# Altium PCB CLAMP_PCB.PcbDoc
Units mm, origin at the board's own origin, x right, y up, seen from the top; angles counter-clockwise.
Board outline 82 x 60 mm, 2 copper layers (Top Layer, Bottom Layer); 12 components, 17 nets, 53 pads, 4 vias.
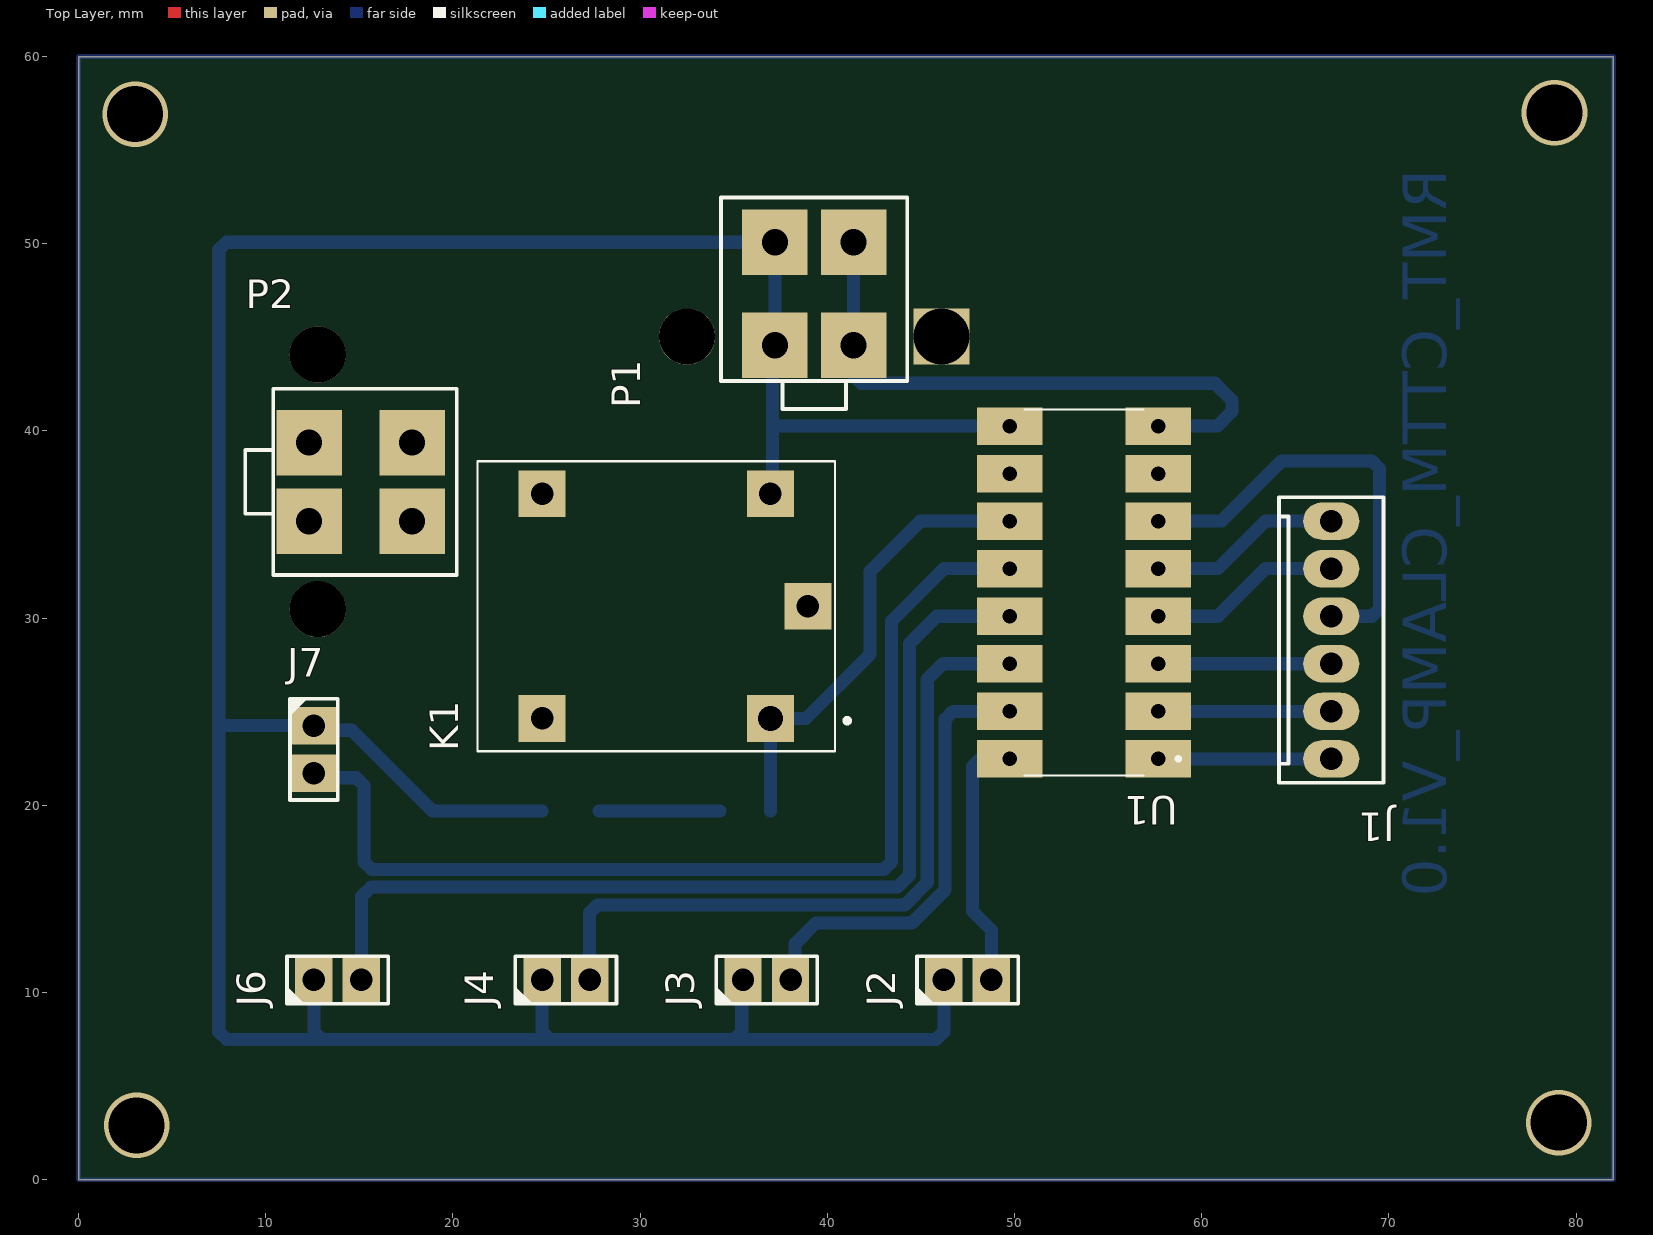
[diagram p0: Top Layer view]
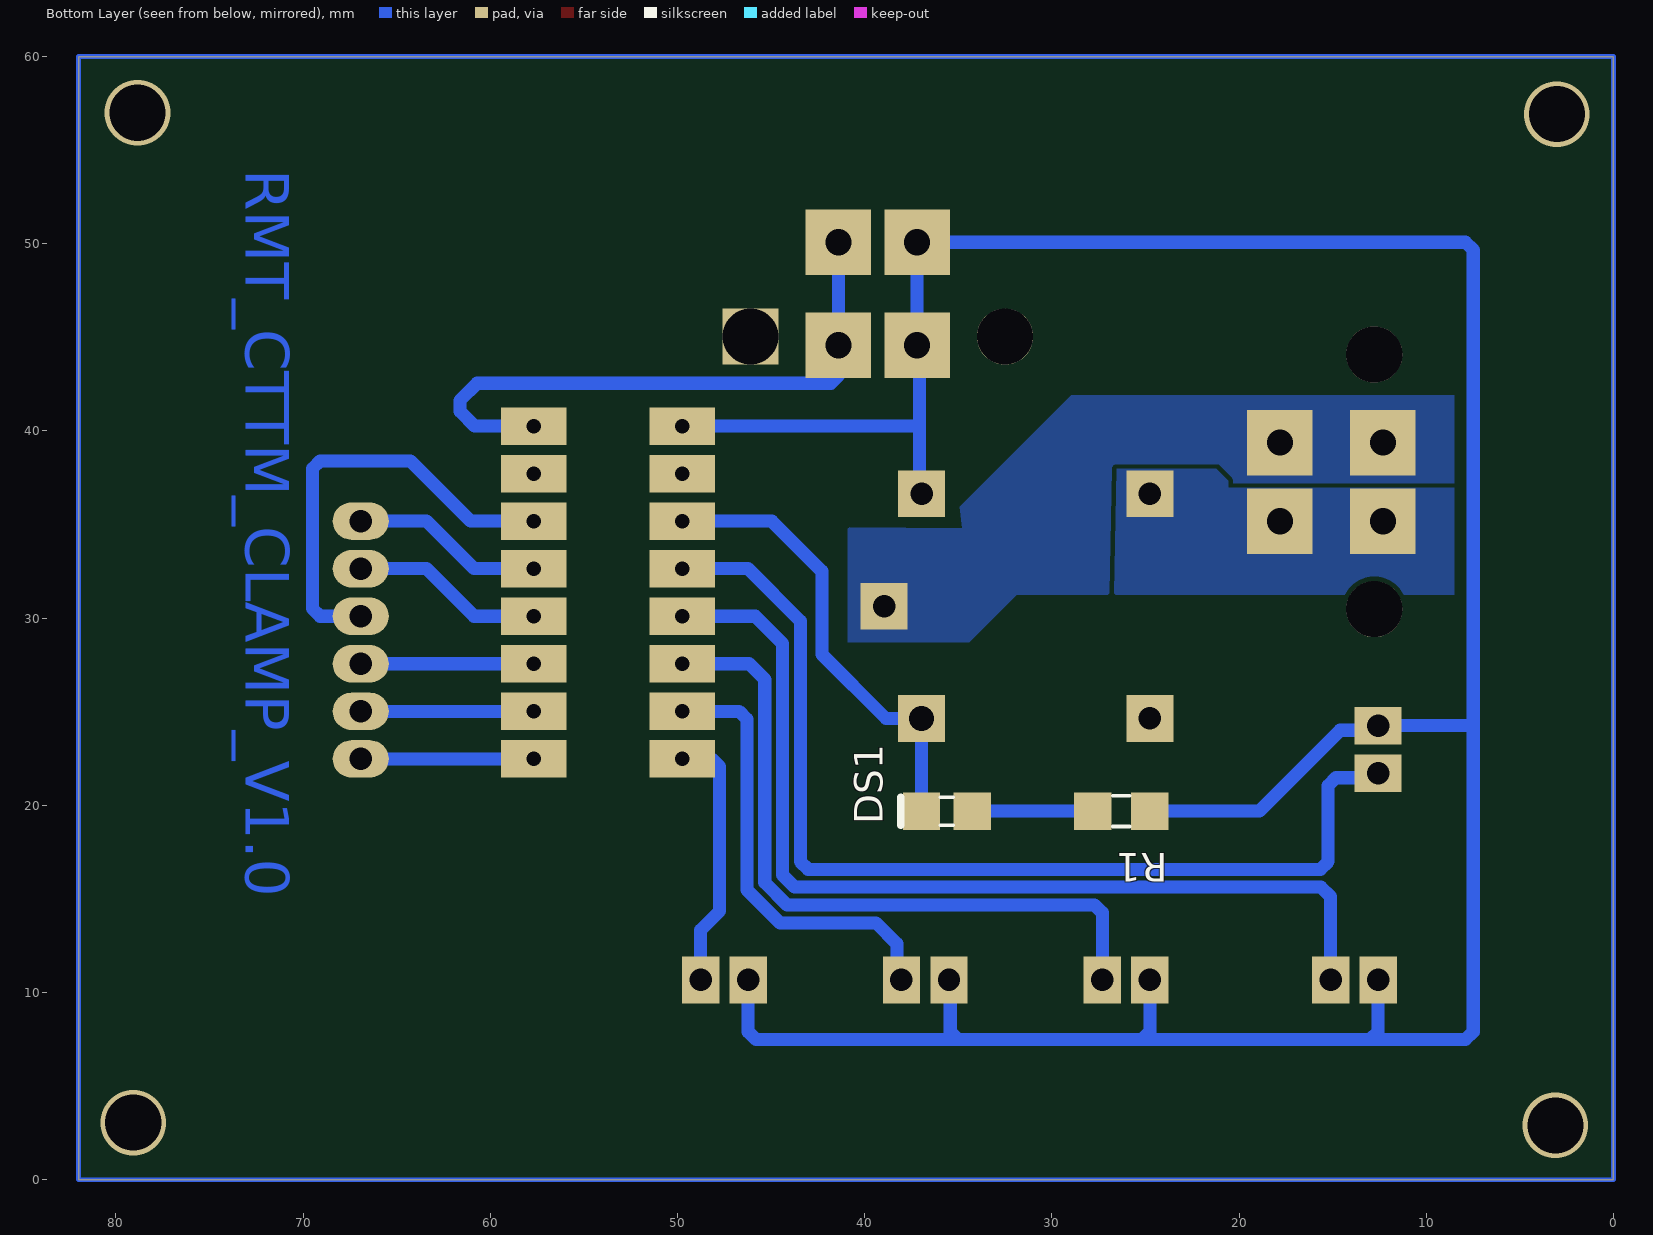
[diagram p1: Bottom Layer view, seen from below]
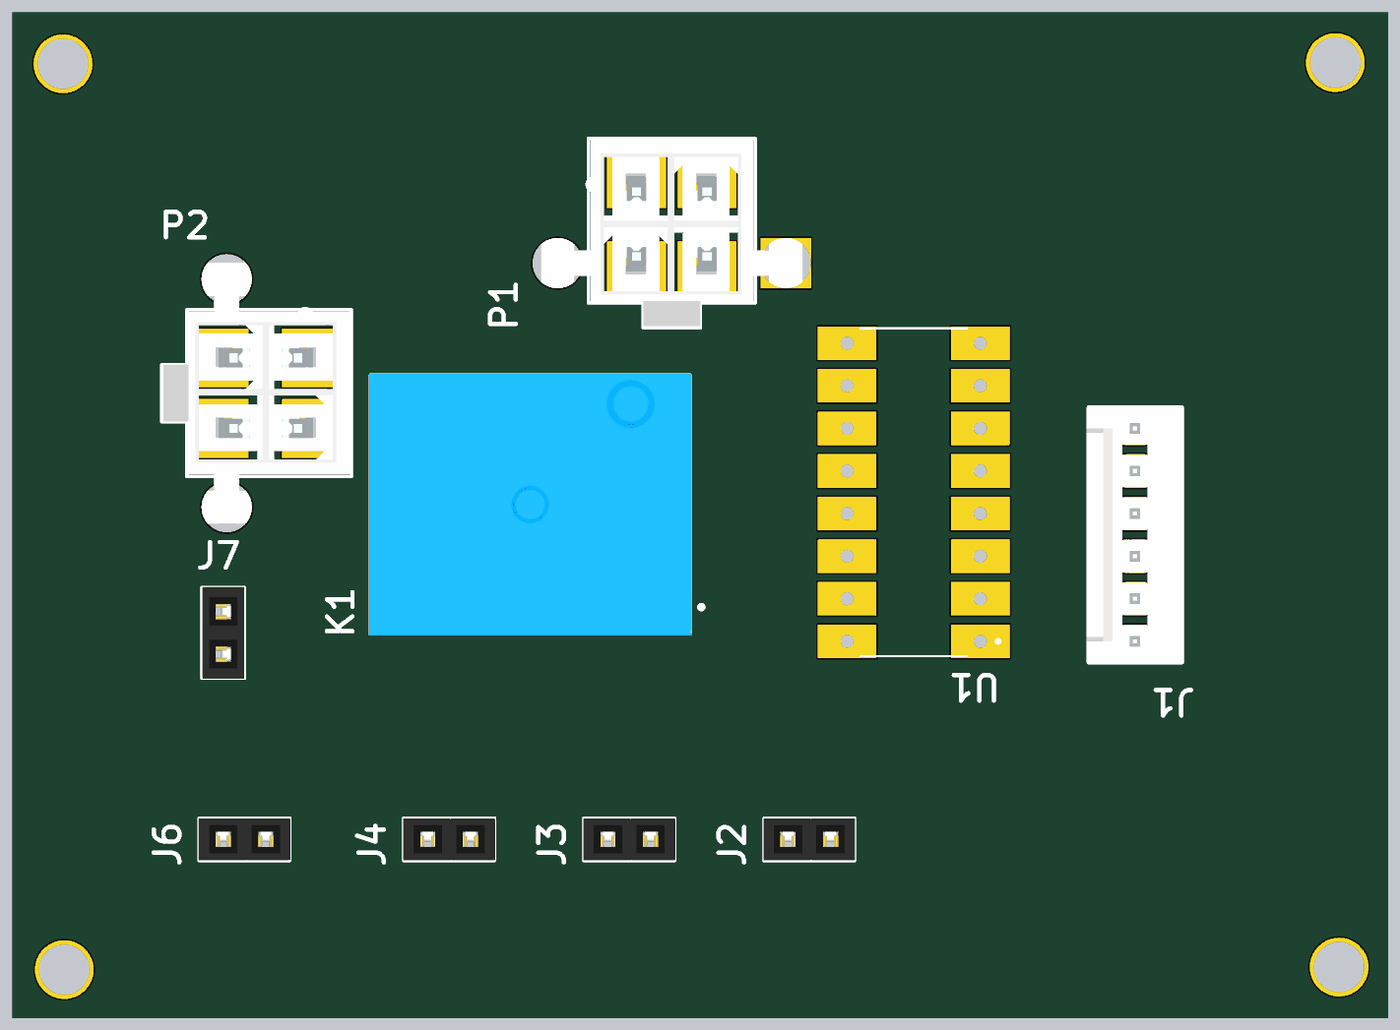
[diagram p2: 3D render of the assembled board from above, using the file's embedded part models]

## Layer stack, top to bottom
Top Solder: solder mask 0.0102, Solder Resist, Dk 3.5
Top Layer: signal copper 0.0356
Dielectric 1: dielectric 0.32, FR-4, Dk 4.8
Bottom Layer: signal copper 0.0356
Bottom Solder: solder mask 0.0102, Solder Resist, Dk 3.5

## Board outline
0,0 0,60 82,60 82,0

## Design rules (kind name [scope] priority, off if disabled: settings)
Clearance [All] p1: gap=0.254 ignorepadtopadclearanceinfootprint=FALSE except(0: Arc-Hole Track-Hole SMDPad-Hole THPad-Hole Via-Hole Fill-Hole Poly-Hole Region-Hole Text-Hole)
PolygonConnect PolygonConnect_2 [All vs IsNamedPolygon('OUT_L02_P001')] p1: connectstyle=Direct reliefconductorwidth=0.254 reliefentries=4 polygonreliefangle="90 Angle" airgapwidth=0.254
PolygonConnect PolygonConnect_1 [All vs IsNamedPolygon('NETK1_NO_L02_P000')] p2: connectstyle=Direct reliefconductorwidth=0.254 reliefentries=4 polygonreliefangle="90 Angle" airgapwidth=0.254
PolygonConnect [All] p3: connectstyle=Relief reliefconductorwidth=0.254 reliefentries=4 polygonreliefangle="90 Angle" airgapwidth=0.254
RoutingVias [All] p1: holewidth=0.711 width=1.27 viastyle="Through Hole" minholewidth=0.711 minwidth=1.27 maxholewidth=0.711 maxwidth=1.27
SolderMaskExpansion [All] p1: expansion=0.102 istentingtop=FALSE
Width [All] p1: maxlimit=0.7 minlimit=0.7 preferedwidth=0.7
30 further rules are at their usual default settings.

## Components (designator, comment, footprint, x,y, rotation, side; value= is the part's Value field where it differs from the comment)
DS1 "SML-LX1206YC-TR" LUMX-SML-LX1206YC-TR_V 35.615,19.685 r0 bottom
J1 "SWITCHING" "MOLEX KK 0022272061" 66.925,28.829 r270 top
J2 "M20-7820242" "HARWIN M20-7820245" 47.498,10.668 r90 top
J3 "M20-7820242" "HARWIN M20-7820245" 36.767,10.668 r90 top
J4 "M20-7820242" "HARWIN M20-7820245" 26.035,10.668 r90 top
J6 "M20-7820242" "HARWIN M20-7820245" 13.843,10.668 r90 top
J7 "M20-7820242" "HARWIN M20-7820245" 12.573,22.987 r0 top
K1 "SRD-05VDC-SL-C" RELAY_SRD-05VDC-SL-C 30.865,30.638 r180 top
P1 "649004221732" 649004221732#1 39.302,47.567 r180 top
P2 "649004221732" 649004221732#2 15.309,37.279 r90 top
R1 "CRCW12061K00FKEA" RESC3216X60X45ML15T20 26.29,19.685 r0 bottom
U1 "ULN2004AIN" DIP794W45P254L1969H508Q16 53.721,31.369 r180 top

## Footprints (in the part's own frame and the unit in brackets; to place one, negate y for a bottom-side part, rotate by r counter-clockwise, add the part's x,y. Pads: shape width x height; smd on the part's side, far side on the other; paste and mask are expansions set on the pad)
649004221732#1 [mm] "4.20mm Male Dual Row Vertical Header with Mounting Pegs, 4p"
  rect 3.5x3.5 hole 1.4: 1(2.1,-2.51) 2(-2.1,-2.51) 3(2.1,2.99) 4(-2.1,2.99)
  rect 3x3 hole 3 unplated: MH1(-6.8,2.53)
  round 3 hole 3 unplated: MH2(6.8,2.53)
  silkscreen extent -4.97,-4.9 4.98,6.4, body extent -7.8,-4.8 7.8,6.3, height 12.84
649004221732#2 [mm] "4.20mm Male Dual Row Vertical Header with Mounting Pegs, 4p"
  rect 3.5x3.5 hole 1.4: 1(2.1,-2.51) 2(-2.1,-2.51) 3(2.1,2.99) 4(-2.1,2.99)
  round 3 hole 3 unplated: MH1(-6.8,2.53) MH2(6.8,2.53)
  silkscreen extent -4.97,-4.9 4.98,6.4, body extent -7.8,-4.8 7.8,6.3, height 12.84
DIP794W45P254L1969H508Q16 [mm]
  rect 3.5x2 hole 0.78: 1(-3.97,8.89) 2(-3.97,6.35) 3(-3.97,3.81) 4(-3.97,1.27) 5(-3.97,-1.27) 6(-3.97,-3.81) 7(-3.97,-6.35) 8(-3.97,-8.89) 9(3.97,-8.89) 10(3.97,-6.35) 11(3.97,-3.81) 12(3.97,-1.27) 13(3.97,1.27) 14(3.97,3.81) 15(3.97,6.35) 16(3.97,8.89)
  silkscreen extent -5.13,-9.77 3.18,9.77
"HARWIN M20-7820245" [mm] "2.54mm DIL PC TAIL PIN HEADER ASSEMBLY"
  rect 2.5x2 hole 1.2: 1(0,1.27) 2(0,-1.27)
  silkscreen extent -1.27,-2.7 1.27,2.73, body extent -1.25,-2.74 1.25,2.74, height 8.5
LUMX-SML-LX1206YC-TR_V [mm] "SMD, 2-Leads, Body 3.2x1.5mm"
  rect 2x2 smd: 1(-1.35,0) 2(1.35,0)
  silkscreen extent -0.35,-0.75 2.45,0.75, body extent -1.6,-0.75 1.6,0.75, height 1.25
"MOLEX KK 0022272061" [mm]
  oval 2x3 hole 1.2: 1(-6.35,0) 2(-3.81,0) 3(-1.27,0) 4(1.27,0) 5(3.81,0) 6(6.35,0)
  silkscreen extent -7.62,-2.79 7.62,2.79, body extent -7.62,-2.9 7.62,2.9, height 11.7
RELAY_SRD-05VDC-SL-C [mm]
  rect 2.5x2.5 hole 1.32: A1(-6.1,6)
  rect 2.5x2.5 hole 1.2: A2(-6.1,-6) COM(-8.1,0) NC(6.1,6) NO(6.1,-6)
  silkscreen extent -10.3,-7.75 9.55,7.75, body extent -9.6,-7.8 9.6,7.8, height 15.8
RESC3216X60X45ML15T20 [mm] "Chip Resistor, 2-Leads, Body 3.3x1.75mm, IPC Low Density"
  rect 2x2 smd: 1(-1.525,0) 2(1.525,0)
  silkscreen extent -0.45,-0.82 0.45,0.82, body extent -1.65,-0.87 1.65,0.87, height 0.6

## Part data
DS1: library part CMP-2000-07124-1, "Yellow LED, Water Clear Len, 585 nm, 2.1 V, -40 to 85 degC, 2-Pin SMD, RoHS, Tape and Reel", Color=Yellow, Current - Test=20mA, Lens Color=Colorless, Manufacturer=Lumex, Millicandela Rating=6mcd, Package / Case=1206(3216Metric), Package Description="2-Pin Surface Mount Device, Body 3.2 x 1.5 mm", Standard Package=3,000, Supplier Device Package=1206, Voltage - Forward (Vf) (Typ)=2.1V, Catalog Drawings=SML-LX1206SeriesTopSML-LX1206SeriesSideSML-LX1206SeriesBottomSML-LX1206SeriesFootprint, Category=Optoelectronics, Datasheet URL=http://www.lumex.com/content/files/ProductAttachment/SML-LX1206YC-TR.pdf, Datasheet Version="Rev. K, 08/2012", Family=LEDIndication-Discrete, Features=-, Height (Max)=1.10mm, Lens Style/Size=RectanglewithFlatTop, Lens Transparency=Clear, Manufacturer URL=http://www.lumexinstruments.com/, Mounting Technology=SurfaceMount, Mounting Type=SurfaceMount, Online Catalog=SML-LX1206RectanglewithFlatTop1206PackageLEDs, Other Names=67-1358-2LU60357TRSMLLX1206YCTR, Package Reference=SML-LX1206YC-TR, Packaging=Tape&Reel(TR), Product Training Modules=LEDsBenefitsofCustomLEDandLCDTechnology, RoHS Information=RoHSCertofCompliance, Series=-, Size / Dimension=3.20mmLx1.60mmW, Viewing Angle=160°, Wavelength - Dominant=-, Wavelength - Peak=585nm
J1: library part 0022272061, "CONN HEADER VERT 6POS 2.54MM", Insulation Color=Natural, Manufacturer=Molex, Material Flammability Rating="UL94 V-0", Supplier Part Number 1=WM4115-ND, ComponentLink1Description=Datasheet, ComponentLink1URL=https://www.molex.com/pdm_docs/sd/022272061_sd.pdf, ComponentLink2Description="DigiKey Link", ComponentLink2URL=http://digikey.com/product-detail/en/molex/0022272061/WM4115-ND/1130581, Connector Type=Header, Contact Finish - Mating=Tin, Contact Finish - Post=Tin, Contact Finish Thickness - Mating="100.0µin (2.54µm)", Contact Length - Mating="0.295\" (7.49mm)", Contact Length - Post="0.140\" (3.56mm)", Contact Material=Brass, Contact Shape=Square, Contact Type="Male Pin", Fastening Type="Friction Lock", Insulation Height="0.461\" (11.70mm)", Insulation Material="Polyamide (PA), Nylon", LastUpdated="1/12/2020 11:52:24 PM", Lifecycle Status=Active, Minimum Order=1, Mounting Type="Through Hole", Number of Positions=6, Number of Positions Loaded=All, Number of Rows=1, Overall Contact Length="0.560\" (14.22mm)", Packaging=Bulk, Part Number=0022272061, Part Status=Active, PartId=80, Pitch - Mating="0.100\" (2.54mm)", Price=0.49, Series="KK 6410", Shrouding="Shrouded - 1 Wall", Style="Board to Cable/Wire", Supplier 1=DigiKey, Termination=Solder
J2 J3 J4 J6 J7: "CONN RCPT 2POS 0.1 GOLD PCB", Current Rating (Amps)=3A, Insulation Color=Black, Manufacturer="Harwin Inc.", Material Flammability Rating="UL94 V-0", Operating Temperature="-40°C ~ 105°C", Supplier Part Number 1=952-1775-ND, ComponentLink1Description=Datasheet, ComponentLink1URL=https://cdn.harwin.com/pdfs/C001XX_M20_Series_Connectors.pdf, ComponentLink2Description="DigiKey Link", ComponentLink2URL=https://www.digikey.com/en/products/detail/harwin-inc/M20-7820242/3727744, Connector Type=Receptacle, Contact Finish - Mating=Gold, Contact Finish - Post=Tin, Contact Finish Thickness - Mating=Flash, Contact Length - Post="0.118\" (3.00mm)", Contact Type="Female Socket", Fastening Type=Push-Pull, Insulation Height="0.335\" (8.51mm)", LastUpdated="9/21/2022 6:53:47 PM", Lifecycle Status=Active, Mated Stacking Heights="11.04mm, 12.63mm", Minimum Order=1, Mounting Type="Through Hole", Number of Positions=2, Number of Positions Loaded=All, Number of Rows=1, Packaging=Tube, Part Number=M20-7820242, Part Status=Active, Pitch - Mating="0.100\" (2.54mm)", Price=0.38, Series=M20, Style="Board to Board or Cable", Supplier 1=DigiKey, Termination=Solder
K1: "5V Trigger Relay Module For Arduino And Raspberry Pi 5V Trigger Relay Module For Arduino And Raspberry Pi", Package="NON STANDARD-5 Songle Relay", Availability="Not in stock", Check_prices=https://www.snapeda.com/parts/SRD-05VDC-SL-C/Songle+Relay/view-part/?ref=eda, MF="Songle Relay", MP=SRD-05VDC-SL-C, Price=None, SnapEDA_Link=https://www.snapeda.com/parts/SRD-05VDC-SL-C/Songle+Relay/view-part/?ref=snap
P1 P2: library part CMP-1502-00506-2, Color=White, Contact Resistance=10mΩ, Current Rating=8A, Insulation Resistance=1GΩ, Max Operating Temperature=105°C, Min Operating Temperature=-40°C, Operating Supply Voltage=600V, Connector Type="Male Pin, Plug", Contact Material=Copper, Contact Plating=Tin, Fastening Type=Ramp, Gender=Male, Height=12.8mm, Lead Pitch=4.2mm, Length=9.6mm, Mount="Through Hole", NexarPartId=23024601, Number of Contacts=4, Number of Pins=4, Number of Positions=4, Number of Rows=2, Orientation=Vertical, Pitch=4.2mm, REACH SVHC=Unknown, RoHS=Compliant, Row Spacing=4.191mm, Termination=Solder, Width=9.6mm
R1: library part CMP-2100-03616-1, "Chip Resistor, 1 KOhm, +/- 1%, 0.25 W, -55 to 155 degC, 1206 (3216 Metric), RoHS, Tape and Reel", Case Code (Imperial)=1206, Case Code (Metric)=3216, Manufacturer="Vishay Semiconductor", Max Operating Temperature=155degC, Max Power Dissipation=250mW, Min Operating Temperature=-55degC, Package Description="2-Pin Surface Mount Device, Body 3.15 x 1.6 mm", Package Quantity=10, Package Reference=1206.0, RESISTANCE=1KOhm, Temperature Coefficient=100ppm/degreesC, Tolerance=1%, Voltage Rating=200V, Case/Package=1206, Composition=ThickFilm, Contact Plating=Tin, Datasheet URL=http://www.farnell.com/datasheets/1720486.pdf, Datasheet Version=41061.0, Depth=1.6mm, Height=0.55mm, Lead Free=LeadFree, Length=3.2mm, Manufacturer URL=http://www.vishay.com/, Military Standard=Not, Mount=SurfaceMount, Number of Pins=2, Number of Terminations=2, Packaging=TapeandReel, Power Rating=250mW, Radiation Hardening=No, REACH SVHC=Unknown, RoHSCompliant=true, Termination=SMD/SMT, Voltage Rating (DC)=200V, Weight=0.000353oz, Width=0.063inch
U1: "50-V, 7-ch darlington transistor array with 15-V input capability, -40 to 105C 16-PDIP -40 to 105", Package="PDIP-16 Texas Instruments", Availability=Warning, Check_prices=https://www.snapeda.com/parts/ULN2004AIN/Texas%20Instruments/view-part/826398/?ref=eda, DigiKey-Purchase-URL=https://snapeda.com/shop?store=DigiKey&id=826398, MF="Texas Instruments", Mouser-Purchase-URL=https://snapeda.com/shop?store=Mouser&id=826398, MP=ULN2004AIN, Price=None, SnapEDA_Link=https://www.snapeda.com/parts/ULN2004AIN/Texas%20Instruments/view-part/826398/?ref=snap, Texas_Instruments-Purchase-URL=https://snapeda.com/shop?store=Texas+Instruments&id=826398

## Via types
v1: diameter 3.5, hole 3, Top Layer to Bottom Layer, 4 vias

## Nets (pads, with @x,y where several pads share a name; then routed paths per layer and width w, separated by ;. In a path a pad name is that pad's centre, name@x,y a point inside that pad or via, vN(x,y) a via of type N, cw(c..) or ccw(c..) an arc to the next point about the centre after c; other vN are vias at no path point)
+12V: J2.1 J3.1 J4.1 J6.1 J7.1 K1.A2 P1.1 P1.3 R1.1 U1.9 | length 169.3
  Bottom Layer w0.7: J6.1 12.573,7.903 12.983,7.493 ; J4.1@24.516,10.917 J4.1 24.765,7.903 25.175,7.493 ; R1.1 18.923,19.685 14.6,24.008 12.822,24.008 J7.1 7.493,24.257 ; J3.1 35.433,10.604 35.433,7.903 35.023,7.493 ; K1.A2 37.083,36.757 37.083,40.259 ; J2.1 46.228,7.903 45.818,7.493 35.023,7.493 ; U1.9 37.083,40.259 ; 7.493,24.257 7.493,7.903 7.903,7.493 12.983,7.493 ; 7.493,24.257 7.493,49.667 7.903,50.077 P1.1 P1.3 37.083,44.459 37.083,40.259 ; 12.983,7.493 25.175,7.493 ; 25.175,7.493 35.023,7.493
AIR_VALUE: J1.6 U1.1 | length 9.2
  Bottom Layer w0.7: U1.1 J1.6
GND: P1.2 P1.4 U1.8 | length 32.7
  Bottom Layer w0.7: P1.2 41.402,42.955 41.812,42.545 60.705,42.545 61.623,41.627 61.623,41.048 60.834,40.259 U1.8
HEATER_SWITCH: J1.3 U1.6 | length 23.5
  Bottom Layer w0.7: U1.6 61.054,35.179 64.275,38.4 69.09,38.4 69.5,37.99 69.5,30.509 69.09,30.099 J1.3
NetDS1_1: DS1.1 R1.2 | length 6.5
  Bottom Layer w0.7: R1.2 DS1.1
NetK1_NO: K1.NO P2.2 P2.4
O1: J2.2 U1.16 | length 13.9
  Bottom Layer w0.7: J2.2@48.768,10.712 48.768,13.335 47.752,14.351 47.752,22.069 48.162,22.479 U1.16
O2: J3.2 U1.15 | length 24
  Bottom Layer w0.7: J3.2 38.285,10.917 38.285,12.602 39.399,13.716 44.531,13.716 46.296,15.481 46.296,24.609 46.706,25.019 U1.15
O3: J4.2 U1.14 | length 37.9
  Bottom Layer w0.7: J4.2 27.305,14.26 27.715,14.67 44.136,14.67 45.342,15.876 45.342,26.723 46.178,27.559 U1.14
O4: J6.2 U1.13 | length 52.5
  Bottom Layer w0.7: J6.2 15.113,15.113 15.624,15.624 43.741,15.624 44.388,16.271 44.388,28.64 45.847,30.099 U1.13
O6: J7.2 U1.12 | length 55.9
  Bottom Layer w0.7: J7.2 12.822,21.468 14.83,21.468 15.24,21.058 15.24,16.988 15.65,16.578 43.024,16.578 43.434,16.988 43.434,29.845 46.228,32.639 U1.12
O7: DS1.2 K1.A1 U1.11 | length 24.7
  Bottom Layer w0.7: DS1.2 K1.A1 38.862,24.638 42.291,28.067 42.291,32.512 44.958,35.179 U1.11
OUT: K1.COM P2.1 P2.3 | length 0
  Bottom Layer w0.7: K1.COM@38.934,30.607 K1.COM
PUMP_IN: J1.4 U1.3 | length 9.2
  Bottom Layer w0.7: U1.3 J1.4
PUMP_OUT: J1.5 U1.2 | length 9.2
  Bottom Layer w0.7: U1.2 J1.5
VALUE_1: J1.2 U1.4 | length 10.3
  Bottom Layer w0.7: U1.4 60.863,30.099 63.403,32.639 J1.2
VALUE_2: J1.1 U1.5 | length 10.3
  Bottom Layer w0.7: U1.5 60.863,32.639 63.403,35.179 J1.1
pads on no net: K1.NC P1.MH1 P1.MH2 P2.MH1 P2.MH2 U1.7 U1.10
copper on no net: | length 284
  Bottom Layer w0.254: 0,0 82,0 82,60 0,60 0,0
  other v1: 3.1,2.9 79.075,3.05 3.025,56.925 78.85,57

## Polygon pours and split planes (outlines as drawn)
OUT on Bottom Layer "OUT_L02_P001" (solid, pour order 1): 8.509,36.957 20.574,36.957 20.574,37.338 21.209,37.973 21.463,37.719 26.543,37.719 26.543,37.973 26.67,37.846 26.67,31.242 31.877,31.242 34.417,28.702 40.894,28.702 40.894,34.866 34.798,34.798 34.925,35.941 28.956,41.91 8.509,41.91
NetK1_NO on Bottom Layer "NETK1_NO_L02_P000" (solid, pour order 0): 8.509,36.957 20.574,36.957 20.574,37.338 21.209,37.973 21.59,37.973 26.543,37.973 26.67,31.242 8.509,31.242

## Other copper
Bottom Layer:
  text "RMT_CTTM_CLAMP_V1.0" at 73.832,53.972 h4 r90